# Altium PCB board_layout.pcbdoc
Units mm, origin at the board's own origin, x right, y up, seen from the top; angles counter-clockwise.
Board outline 82.6 x 98 mm, 4 copper layers (Top Layer, Mid Layer Top, Mid Layer Bottom, Bottom Layer), stack 1.742 mm thick; 10 components, 0 nets, 10 pads, 0 vias.
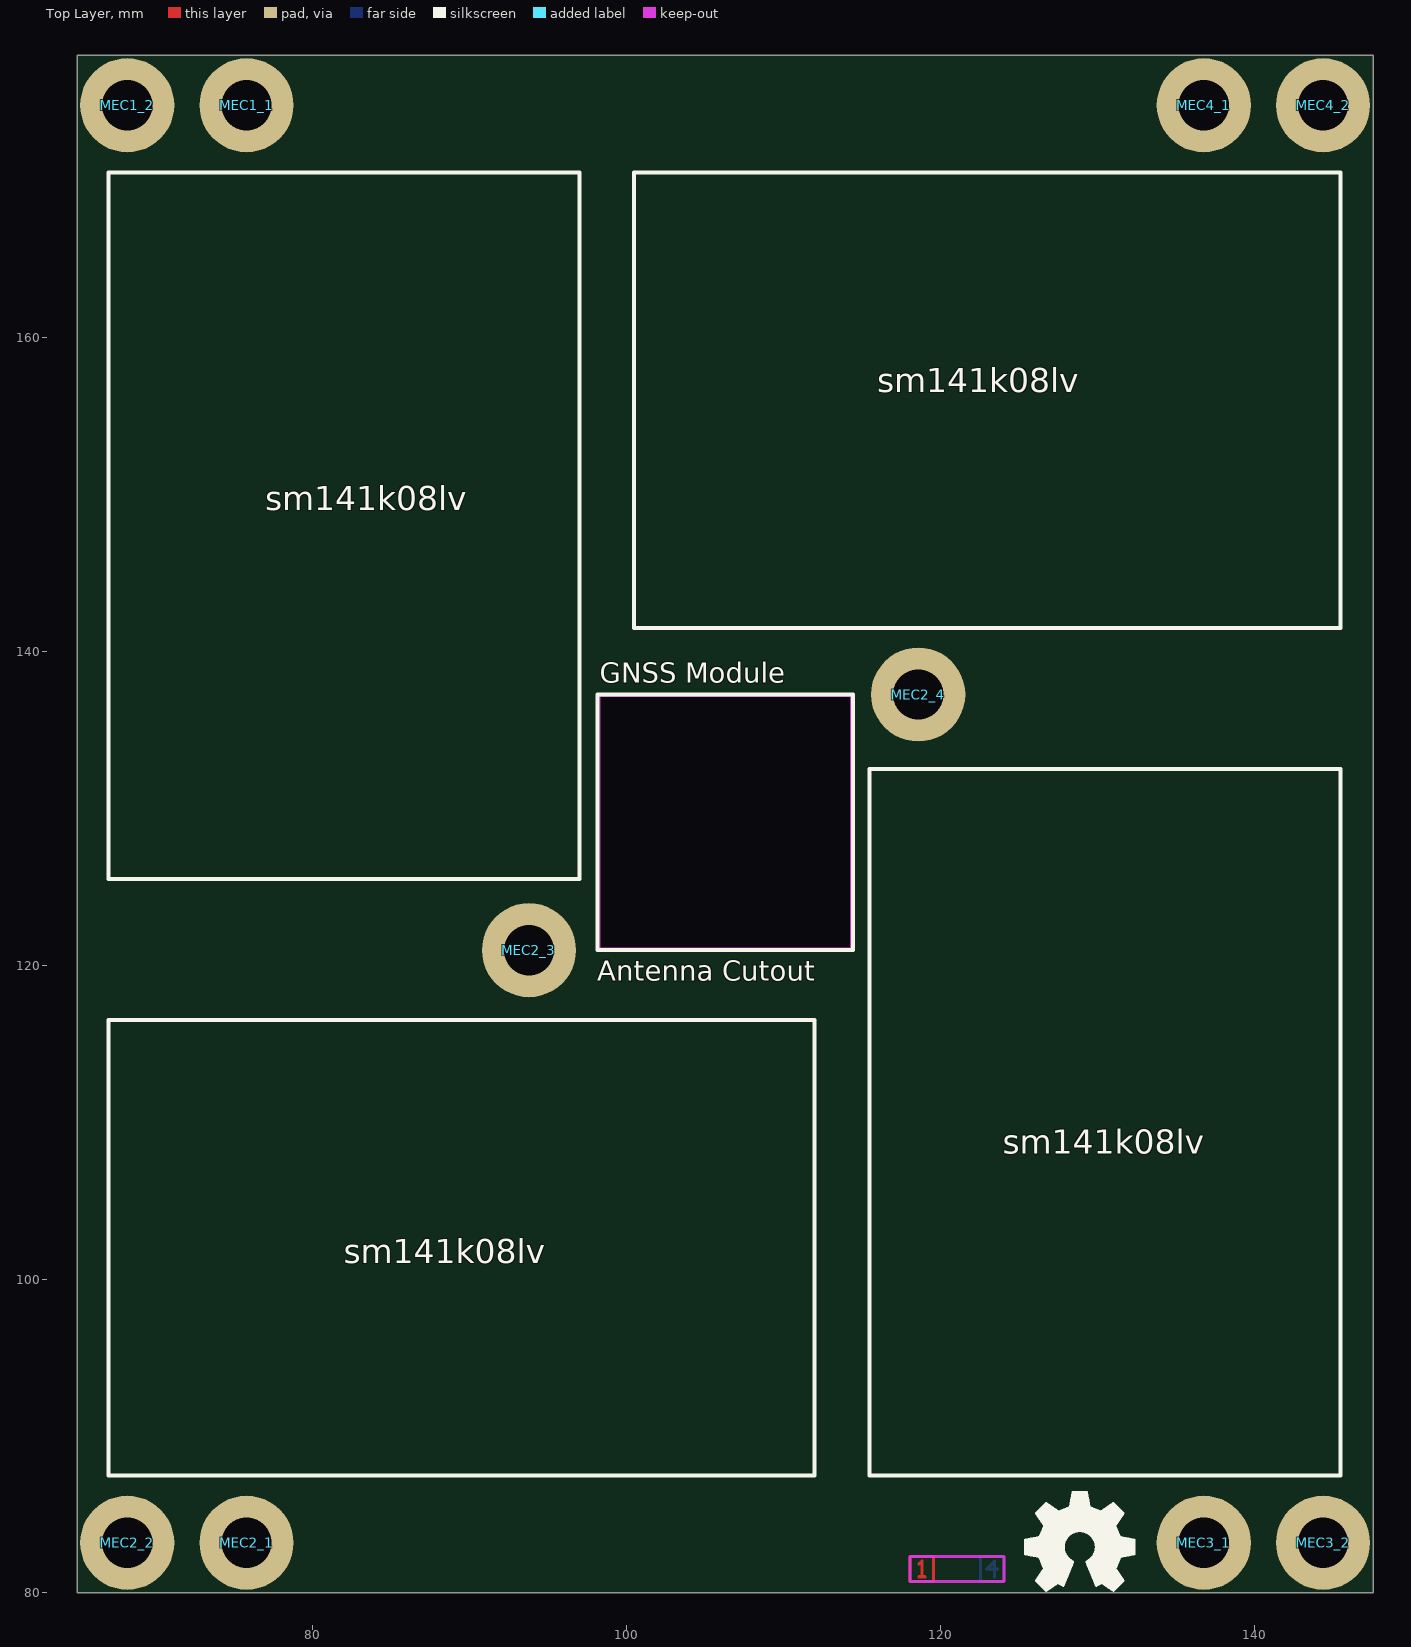
[diagram p0: Top Layer view]
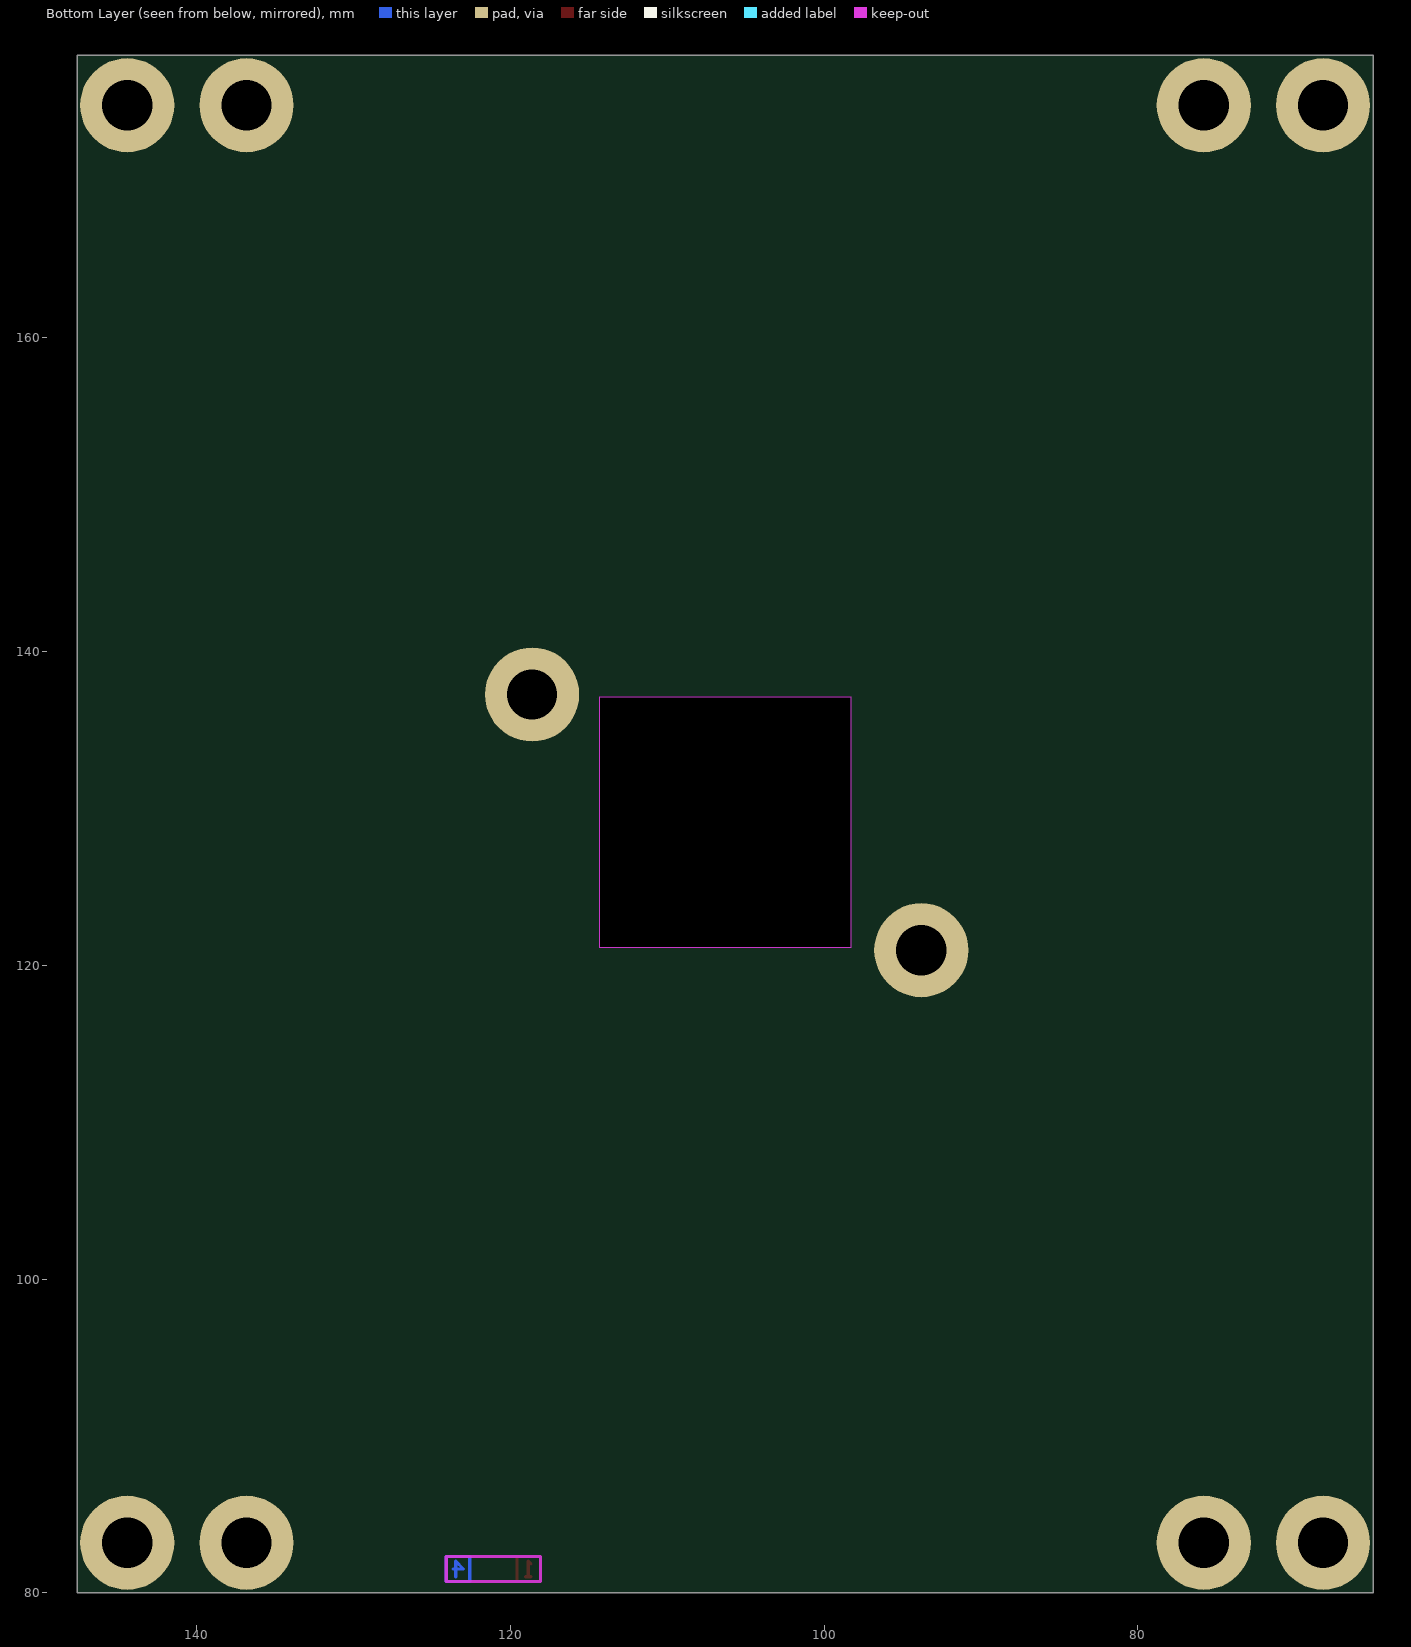
[diagram p1: Bottom Layer view, seen from below]
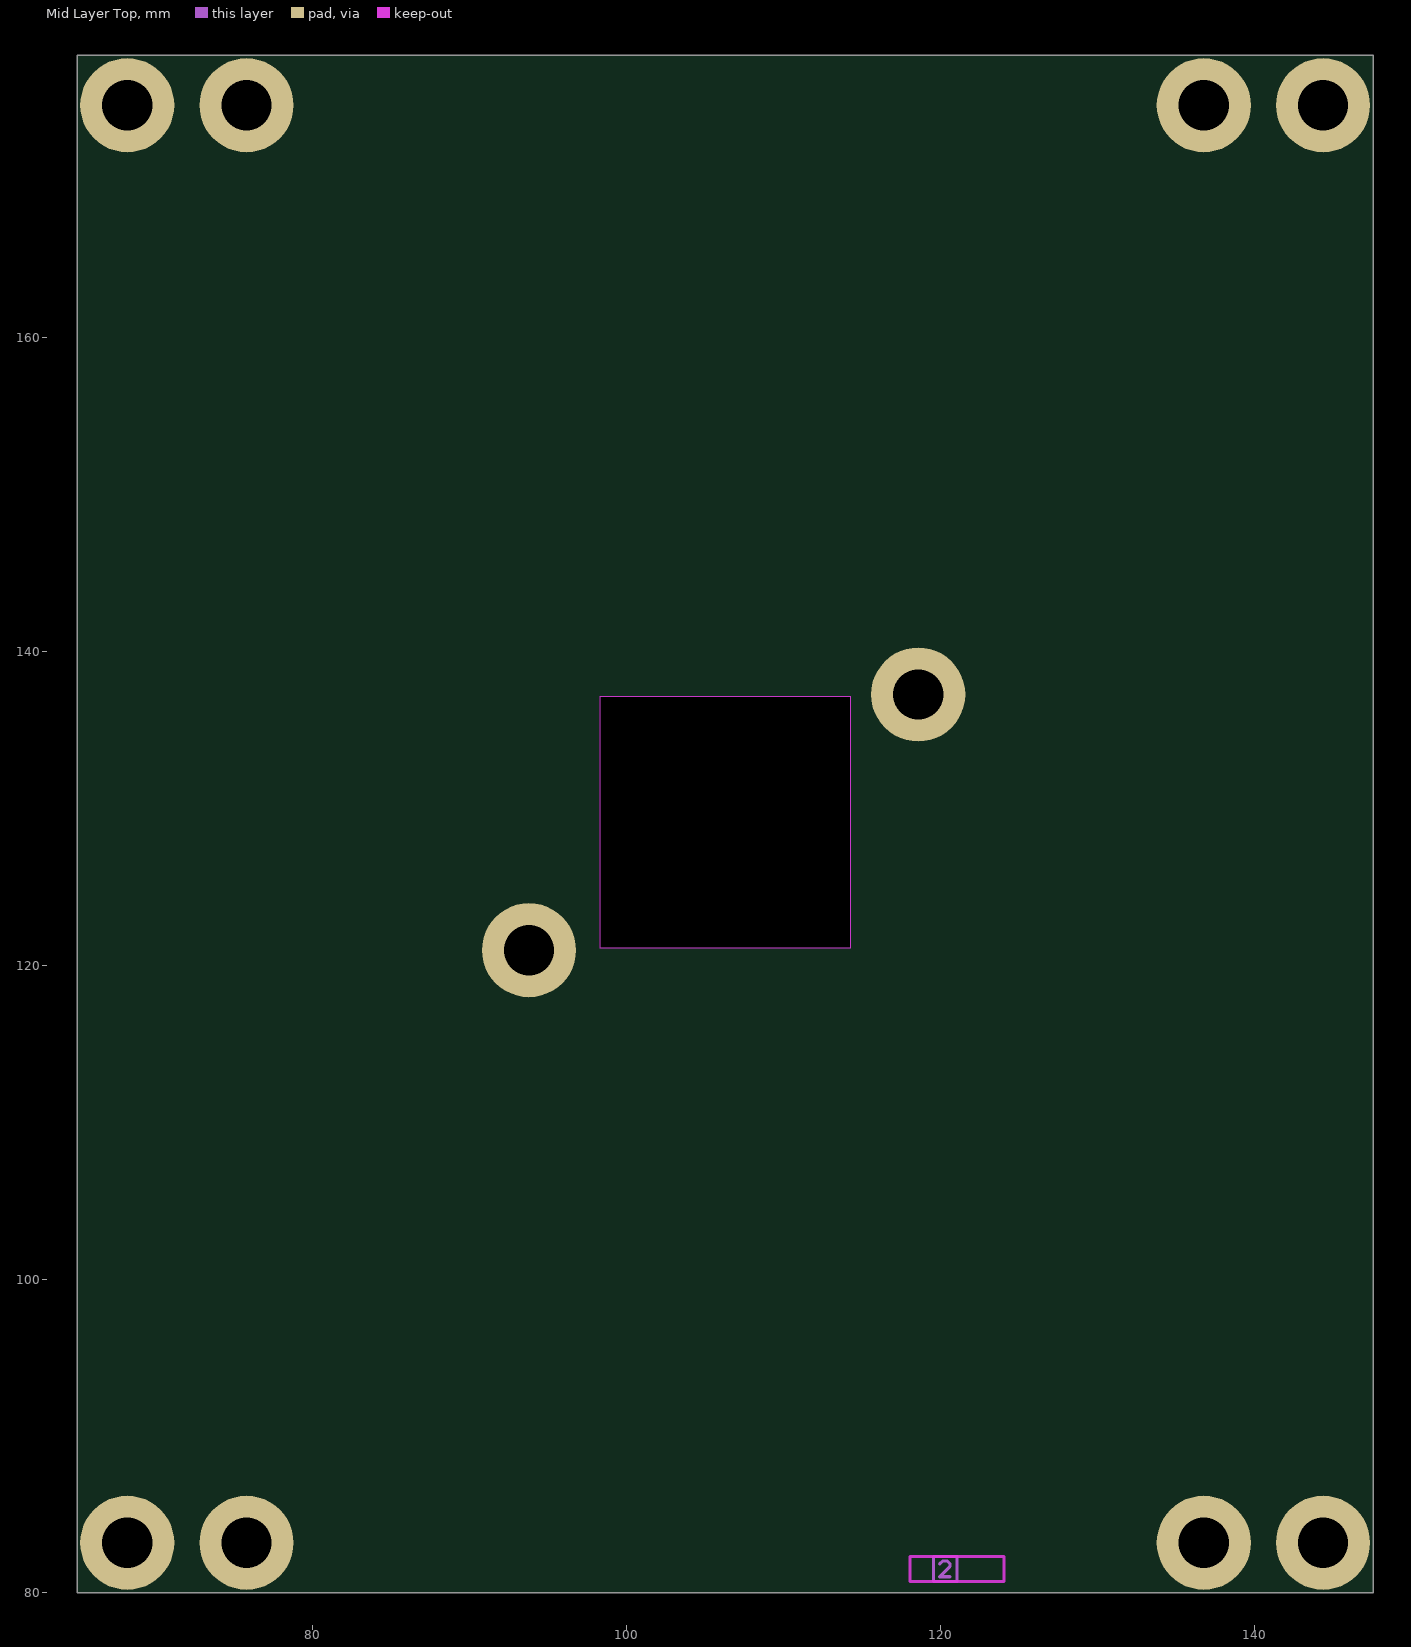
[diagram p2: Mid Layer Top]
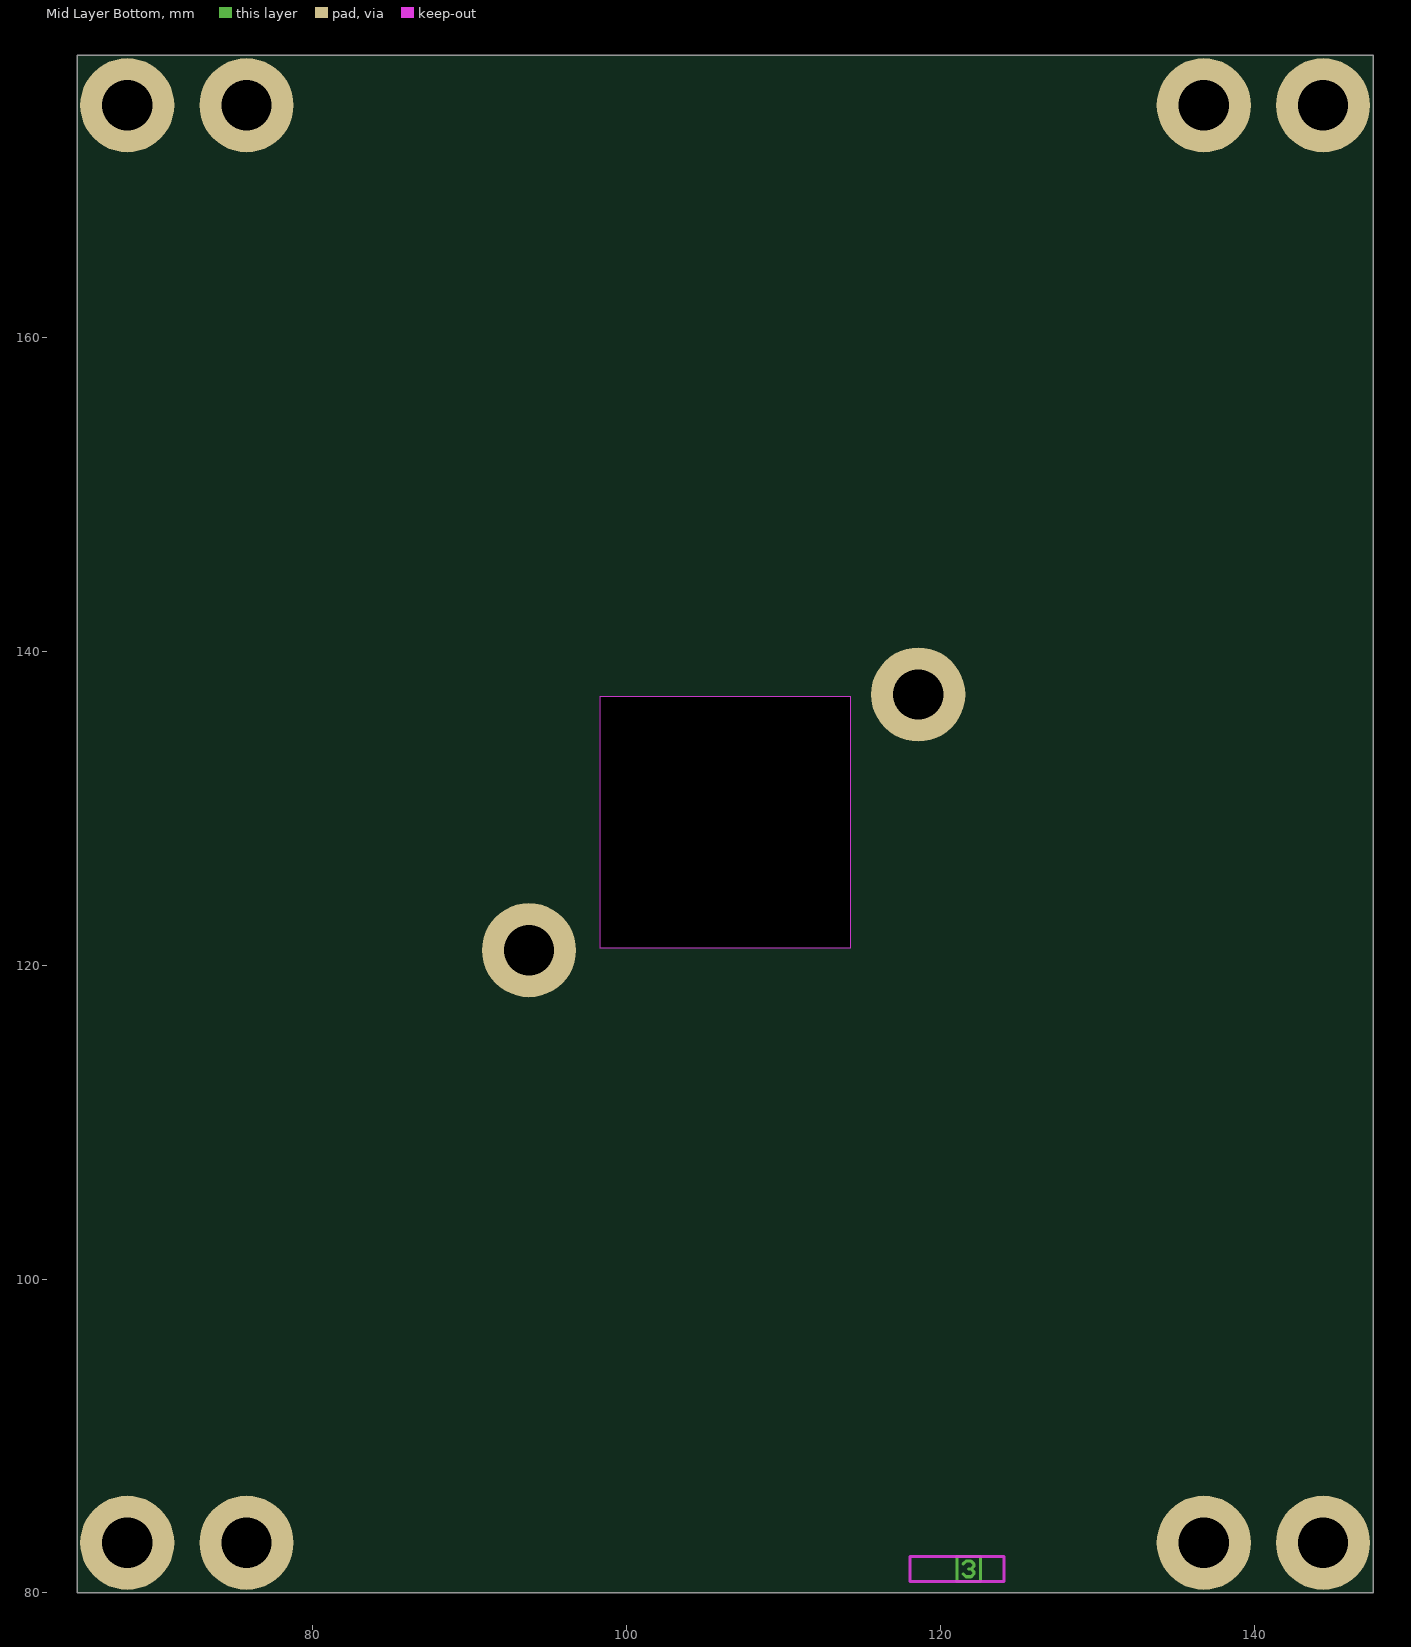
[diagram p3: Mid Layer Bottom]

## Layer stack, top to bottom
Top Solder: solder mask 0.01, Solder Resist, Dk 3.5
Top Layer: signal copper 0.035
Dielectric 1: prepreg 0.0711, PP-006, Dk 4.1
Mid Layer Top: signal copper 0.035
Dielectric Core: core 1.46, FR-4, Dk 4.8
Mid Layer Bottom: signal copper 0.035
Dielectric 2: prepreg 0.0711, PP-006, Dk 4.1
Bottom Layer: signal copper 0.035
Bottom Solder: solder mask 0.01, Solder Resist, Dk 3.5

## Board outline
65,80 147.6,80 147.6,178 65,178
cut-out: 98.3,137.1 98.3,121.1 114.3,121.1 114.3,137.1

## Design rules (kind name [scope] priority, off if disabled: settings)
Clearance Clearance_6 [InNet('GND')] p1: gap=0.254 ignorepadtopadclearanceinfootprint=FALSE except(0: Arc-Hole Track-Hole SMDPad-Hole THPad-Hole Via-Hole Fill-Hole Poly-Hole Region-Hole Text-Hole; 0.178: Arc-Arc Arc-Track Arc-SMDPad Track-Track Track-SMDPad SMDPad-SMDPad; 0.381: Arc-Text Track-Text SMDPad-Text THPad-Text Via-Text; 0.508: Fill-Text Poly-Text Region-Text Text-Text)
Clearance Clearance_1 [InNet('ESD') And OnLayer('Multi-Layer') vs OnLayer('Keep-Out Layer')] p2: gap=0.254 ignorepadtopadclearanceinfootprint=FALSE except(0: Arc-SMDPad Arc-THPad Arc-Via Arc-Hole Track-SMDPad Track-THPad Track-Via Track-Hole SMDPad-Hole THPad-Hole Via-Hole Fill-Hole Poly-Hole Region-Hole Text-Hole; 0.178: Arc-Arc Arc-Track Track-Track SMDPad-SMDPad; 0.381: Arc-Text Track-Text SMDPad-Text THPad-Text Via-Text; 0.508: Fill-Text Poly-Text Region-Text Text-Text)
Clearance Clearance_2 [OnLayer('Multi-Layer') vs OnLayer('Keep-Out Layer')] p3: gap=0.254 ignorepadtopadclearanceinfootprint=FALSE except(0: Arc-SMDPad Arc-THPad Arc-Via Arc-Hole Track-SMDPad Track-THPad Track-Via Track-Hole SMDPad-Hole THPad-Hole Via-Hole Fill-Hole Poly-Hole Region-Hole Text-Hole; 0.178: Arc-Arc Arc-Track Track-Track SMDPad-SMDPad; 0.381: Arc-Text Track-Text SMDPad-Text THPad-Text Via-Text; 0.508: Fill-Text Poly-Text Region-Text Text-Text)
Clearance [All] p4: gap=0.178 ignorepadtopadclearanceinfootprint=FALSE except(0: Arc-Hole Track-Hole SMDPad-Hole THPad-Hole Via-Hole Fill-Hole Poly-Hole Region-Hole Text-Hole; 0.177: Arc-SMDPad Arc-Via Track-SMDPad Track-Via)
DiffPairsRouting DiffPairsRouting_1 [InDifferentialPair('XT2')] p1: maxlimit=0.254 minlimit=0.254 mostfreqgap=0.254 toplayer_minwidth=0.254 toplayer_maxwidth=0.254 toplayer_prefwidth=0.254 midlayer1_minwidth=0.254 midlayer1_maxwidth=0.254 midlayer1_prefwidth=0.254 midlayer2_minwidth=0.254 midlayer2_maxwidth=0.254 midlayer2_prefwidth=0.254 bottomlayer_minwidth=0.254 bottomlayer_maxwidth=0.254 bottomlayer_prefwidth=0.254 maxuncoupledlength=12.7
DiffPairsRouting [All] p2: maxlimit=0.152 minlimit=0.152 mostfreqgap=0.152 toplayer_minwidth=0.457 toplayer_maxwidth=0.457 toplayer_prefwidth=0.457 midlayer1_minwidth=0.457 midlayer1_maxwidth=0.457 midlayer1_prefwidth=0.457 midlayer2_minwidth=0.457 midlayer2_maxwidth=0.457 midlayer2_prefwidth=0.457 bottomlayer_minwidth=0.457 bottomlayer_maxwidth=0.457 bottomlayer_prefwidth=0.457 maxuncoupledlength=12.7
HoleSize [All] p1: absolutevalues=TRUE maxlimit=5.08 minlimit=0.025 maxpercent=80.000 minpercent=20.000
MinimumSolderMaskSliver [All] p1: minsoldermaskwidth=0
PlaneConnect [InNetClass('power')] p1: planeconnectstyle=Direct reliefexpansion=0.508 reliefentries=4 reliefconductorwidth=0.254 reliefairgap=0.254
PlaneConnect PlaneConnect_1 [All] p2: planeconnectstyle=Relief reliefexpansion=0.508 reliefentries=4 reliefconductorwidth=0.254 reliefairgap=0.254
PolygonConnect PolygonConnect_3 [InNet('GND') vs InNet('GND')] p1: thpad.connectstyle=Direct thpad.reliefconductorwidth=0.508 thpad.reliefentries=4 thpad.polygonreliefangle="90 Angle" thpad.airgapwidth=0.254 smdpad.connectstyle=Relief smdpad.reliefconductorwidth=0.508 smdpad.reliefentries=4 smdpad.polygonreliefangle="90 Angle" smdpad.airgapwidth=0.254 via.connectstyle=Direct via.reliefconductorwidth=0.508 via.reliefentries=4 via.polygonreliefangle="90 Angle" via.airgapwidth=0.254
PolygonConnect PolygonConnect_2 [InNet('AGND') vs InNet('AGND')] p2: thpad.connectstyle=Direct thpad.reliefconductorwidth=0.254 thpad.reliefentries=4 thpad.polygonreliefangle="90 Angle" thpad.airgapwidth=0.254 smdpad.connectstyle=Relief smdpad.reliefconductorwidth=0.508 smdpad.reliefentries=4 smdpad.polygonreliefangle="90 Angle" smdpad.airgapwidth=0.254 via.connectstyle=Direct via.reliefconductorwidth=0.254 via.reliefentries=4 via.polygonreliefangle="90 Angle" via.airgapwidth=0.254
PolygonConnect [InNetClass('power')] p3: connectstyle=Direct reliefconductorwidth=0.254 reliefentries=4 polygonreliefangle="90 Angle" airgapwidth=0.254
PolygonConnect PolygonConnect_1 [All] p4: connectstyle=Direct reliefconductorwidth=0.254 reliefentries=4 polygonreliefangle="90 Angle" airgapwidth=0.254
RoutingVias [All] p1: holewidth=0.3 width=0.6 viastyle="Through Hole" minholewidth=0.3 minwidth=0.6 maxholewidth=0.9 maxwidth=1.5
SilkToSilkClearance [All] p1: silktosilkclearance=0.127
SilkToSolderMaskClearance [IsPad] p1: minsilkscreentomaskgap=0 clearancetoexposedcopper=TRUE
SolderMaskExpansion [All] p1: expansion=0.178
Width Width_Power [InNetClass('Power')] p1: maxlimit=0.762 minlimit=0.508 preferedwidth=0.508
Width [All] p2: maxlimit=1.778 minlimit=0.127 preferedwidth=0.254
24 further rules are at their usual default settings.

## Classes and differential pairs
component class 0_architecture: M1 M2 M3 M4 M5 M6 M7 M8

## Components (designator, comment, footprint, x,y, rotation, side; value= is the part's Value field where it differs from the comment)
MEC1_1 "M3" "M3 hole"#1 68.2,174.8 r0 top (schematic designator MEC1)
MEC1_2 "M3" "M3 hole"#2 68.2,174.8 r0 top (schematic designator MEC1)
MEC2_1 "M3" "M3 hole"#1 68.2,83.2 r0 top (schematic designator MEC2)
MEC2_2 "M3" "M3 hole"#2 68.2,83.2 r0 top (schematic designator MEC2)
MEC2_3 "M3" "M3 hole"#1 86.2,120.957 r0 top (schematic designator MEC2)
MEC2_4 "M3" "M3 hole"#3 112.1,137.25 r0 top (schematic designator MEC2)
MEC3_1 "M3" "M3 hole"#4 144.4,83.2 r0 top (schematic designator MEC3)
MEC3_2 "M3" "M3 hole"#2 144.4,83.2 r0 top (schematic designator MEC3)
MEC4_1 "M3" "M3 hole"#4 144.4,174.8 r0 top (schematic designator MEC4)
MEC4_2 "M3" "M3 hole"#2 144.4,174.8 r0 top (schematic designator MEC4)

## Footprints (in the part's own frame and the unit in brackets; to place one, negate y for a bottom-side part, rotate by r counter-clockwise, add the part's x,y. Pads: shape width x height; smd on the part's side, far side on the other; paste and mask are expansions set on the pad)
"M3 hole"#1 [mm]
  round 6 hole 3.2: 0(7.6,0)
"M3 hole"#2 [mm]
  round 6 hole 3.2: 0(0,0)
"M3 hole"#3 [mm]
  round 6 hole 3.2: 0(6.5,0)
"M3 hole"#4 [mm]
  round 6 hole 3.2: 0(-7.6,0)

## Part data
MEC1_1 MEC1_2 MEC2_1 MEC2_2 MEC2_3 MEC2_4 MEC3_1 MEC3_2 MEC4_1 MEC4_2: library part "M3 hole", "M3 hole"

## Nets (pads, with @x,y where several pads share a name; then routed paths per layer and width w, separated by ;. In a path a pad name is that pad's centre, name@x,y a point inside that pad or via, vN(x,y) a via of type N, cw(c..) or ccw(c..) an arc to the next point about the centre after c; other vN are vias at no path point)
pads on no net: MEC1_1.0 MEC1_2.0 MEC2_1.0 MEC2_2.0 MEC2_3.0 MEC2_4.0 MEC3_1.0 MEC3_2.0 MEC4_1.0 MEC4_2.0
copper on no net: | length 33.9
  Top Layer w0.2: 118.672,81.031 118.847,81.031 ; 118.672,81.856 118.847,82.031 118.847,81.031 ; 119.022,81.031 118.847,81.031 ; 118.072,80.731 119.572,80.731 119.572,82.331 118.072,82.331 118.072,80.731
  Mid Layer Top w0.2: 119.972,81.856 120.147,82.031 120.472,82.031 120.622,81.881 120.622,81.681 119.972,81.031 120.622,81.031 ; 119.572,80.731 121.072,80.731 121.072,82.331 119.572,82.331 119.572,80.731
  Mid Layer Bottom w0.2: 121.472,81.206 121.647,81.031 121.972,81.031 122.147,81.206 122.147,81.356 121.972,81.531 ; 121.472,81.856 121.647,82.031 121.972,82.031 122.147,81.856 122.147,81.706 121.972,81.531 ; 121.797,81.531 121.972,81.531 ; 121.072,80.731 122.572,80.731 122.572,82.331 121.072,82.331 121.072,80.731
  Bottom Layer w0.2: 123.472,81.031 123.472,82.031 122.972,81.531 123.647,81.531 ; 122.572,80.731 122.572,82.331 124.072,82.331 124.072,80.731 122.572,80.731

## Keep-outs
Keep-Out Layer:
  lines w0.2: 118.072,80.731 124.072,80.731 124.072,82.331 118.072,82.331 118.072,80.731

## Other copper
Top Layer:
  text "'.Layer_Name'" at 231.245,45.003 h2.5
Bottom Layer:
  text "'.Layer_Name'" at 231.245,45.003 h2.5

## Silkscreen, mask and mechanical layers (free items; w line width, h text height)
Top Overlay:
  drawing of 997 lines, arcs and shapes, not listed
  text "sm141k08lv" at 116,156.5 h1.52
  text "sm141k08lv" at 77,149 h1.52
  text "GNSS Module" at 98.3,138 h1.27
  text "Antenna Cutout" at 98.15,119 h1.27
  text "sm141k08lv" at 124,108 h1.52
  text "sm141k08lv" at 82,101 h1.52
  text "'.Layer_Name'" at 231.245,45.003 h2.5
Bottom Overlay:
  text "'.Layer_Name'" at 231.245,45.003 h2.5
Top Paste:
  text "'.Layer_Name'" at 231.245,45.003 h2.5
Bottom Paste:
  text "'.Layer_Name'" at 231.245,45.003 h2.5
Top Solder:
  rectangle: 117.872,80.531 124.272,82.531
  lines w0.2: 117.872,80.731 ccw(c118.072,80.731) 118.072,80.531 124.072,80.531 ccw(c124.072,80.731) 124.272,80.731 124.272,82.331 ccw(c124.072,82.331) 124.072,82.531 118.072,82.531 ccw(c118.072,82.331) 117.872,82.331 117.872,80.731
  text "'.Layer_Name'" at 231.245,45.003 h2.5
Bottom Solder:
  rectangle: 117.872,80.531 124.272,82.531
  lines w0.2: 117.872,80.731 ccw(c118.072,80.731) 118.072,80.531 124.072,80.531 ccw(c124.072,80.731) 124.272,80.731 124.272,82.331 ccw(c124.072,82.331) 124.072,82.531 118.072,82.531 ccw(c118.072,82.331) 117.872,82.331 117.872,80.731
  text "'.Layer_Name'" at 231.245,45.003 h2.5
Drill Guide:
  text "'.Layer_Name'" at 231.245,45.003 h2.5
3D Body:
  text "'.Layer_Name'" at 231.275,44.958 h2.5
Dimension:
  text "'.Layer_Name'" at 231.245,45.003 h2.5
Mechanical 3:
  text "'.Layer_Name'" at 238.57,51.195 h2.5
Mechanical 4:
  text "'.Layer_Name'" at 238.57,51.195 h2.5
Mechanical 8:
  text "'.Layer_Name'" at 238.57,51.195 h2.5
Board Edge:
  the board outline again, w0.254
ASM Bottom:
  text "'.Layer_Name'" at 231.275,45.008 h2.5
ASM Top:
  text "'.Layer_Name'" at 231.245,45.003 h2.5
Sheet:
  drawing of 339 lines, arcs and shapes, not listed
  text "1" at 62.42,218.152 h1.78
  text "2" at 135.064,218.152 h1.78
  text "3" at 208.216,218.152 h1.78
  text "4" at 281.114,218.152 h1.78
  text "Layer" at 185.885,196.342 h1.52
  text "Name" at 196.297,196.342 h1.52
  text "Material" at 222.96,196.342 h1.52
  text "Thickness" at 244.798,196.342 h1.52
  text "Constant" at 261.304,196.342 h1.52
  text "Board Layer Stack" at 275.778,196.342 h1.52
  text "A" at 28.079,195.14 h1.78
  text "A" at 315.099,195.14 h1.78
  text "Top Overlay" at 196.297,193.294 h1.52
  text "Top Solder" at 196.297,190.246 h1.52
  text "Solder Resist" at 222.96,190.246 h1.52
  text "0,39mil" at 244.798,190.246 h1.52
  text "3,5" at 261.304,190.246 h1.52
  text "1" at 185.885,187.198 h1.52
  text "Top Layer" at 196.297,187.198 h1.52
  text "Copper" at 222.96,187.198 h1.52
  text "1,38mil" at 244.798,187.198 h1.52
  text "Dielectric 1" at 196.297,184.15 h1.52
  text "PP-006" at 222.96,184.15 h1.52
  text "2,80mil" at 244.798,184.15 h1.52
  text "4,1" at 261.304,184.15 h1.52
  text "2" at 185.885,181.102 h1.52
  text "Mid Layer Top" at 196.297,181.102 h1.52
  text "Copper" at 222.96,181.102 h1.52
  text "1,38mil" at 244.798,181.102 h1.52
  text "Dielectric Core" at 196.297,178.054 h1.52
  text "FR-4" at 222.96,178.054 h1.52
  text "57,48mil" at 244.798,178.054 h1.52
  text "4,8" at 261.304,178.054 h1.52
  text "3" at 185.885,175.006 h1.52
  text "Mid Layer Bottom" at 196.297,175.006 h1.52
  text "Copper" at 222.96,175.006 h1.52
  text "1,38mil" at 244.798,175.006 h1.52
  text "Dielectric 2" at 196.297,171.958 h1.52
  text "PP-006" at 222.96,171.958 h1.52
  text "2,80mil" at 244.798,171.958 h1.52
  text "4,1" at 261.304,171.958 h1.52
  text "4" at 185.885,168.91 h1.52
  text "Bottom Layer" at 196.297,168.91 h1.52
  text "Copper" at 222.96,168.91 h1.52
  text "1,38mil" at 244.798,168.91 h1.52
  text "Bottom Solder" at 196.297,165.862 h1.52
  text "Solder Resist" at 222.96,165.862 h1.52
  text "0,39mil" at 244.798,165.862 h1.52
  text "3,5" at 261.304,165.862 h1.52
  text "Bottom Overlay" at 196.297,162.814 h1.52
  text "B" at 28.079,147.083 h1.78
  text "B" at 315.099,147.083 h1.78
  text "Fabrication specifications:" at 184.012,125.356 h3.1
  text "- Copper base 1OZ:  / - PCB Material: Prepeg FR4-Standard / - PCB Tickness: 1.6mm / - PCB Surface: HASL (with lead)" at 184.006,108.372 h1.73
  text "- Silkscreen Color: White (top and bottom) / - Soldermask Color: Blue / - Vias: Force Complete Tenting / - Special: Stack-up (herein included)" at 241.706,108.372 h1.73
  text "Assembly specifications:" at 184.287,102.376 h3.1
  text "C" at 28.079,98.569 h1.78
  text "C" at 315.099,98.569 h1.78
  text "- Solder composition: Include lead / - Fiducials: 3 top and 3 bottom avaliable / - Check BOM for not placed components" at 184.281,85.382 h1.73
  text "Notes:" at 184.281,83.012 h3.1
  text "- 5220mm^2 of solar cells area / - Center screws for devices attachment / - GNSS antenna cutout" at 184.281,66 h1.73
  text "SpaceLab - Federal University of Santa Catarina" at 224.174,54.541 h2.5
  text "D" at 28.079,50.563 h1.78
  text "D" at 315.099,50.563 h1.78
  text "Project:" at 224.174,50.041 h2.5
  text "SPY" at 232.174,50.041 h2.5
  text "Layer:" at 224.174,45.041 h2.5
  text "Designed by:" at 224.174,40.041 h2.5
  text "Project Code:" at 282.174,40.041 h2.5
  text "SPY" at 296.674,40.041 h2.5
  text "Andre M. P. Mattos" at 238.1,40.008 h2.5
  text "v0.1" at 262.2,35.108 h2.5
  text "Date:" at 224.174,35.041 h2.5
  text "'.Print_Date'" at 230.174,35.041 h2.5
  text "Version:" at 253.174,35.041 h2.5
  text "Size:" at 282.174,35.041 h2.5
  text "A4" at 288.174,35.041 h2.5
  text "1" at 62.42,30.192 h1.78
  text "2" at 135.064,30.192 h1.78
  text "3" at 208.216,30.192 h1.78
  text "4" at 281.114,30.192 h1.78
Drill Drawing:
  circle w0.254: c186.069,138.065 r0.675
  lines w0.381: 184.167,136.478 299.09,136.478 ; 184.167,139.518 299.09,139.518 ; 195.492,133.439 195.492,142.557 ; 206.331,133.439 206.331,142.557 ; 230.132,133.439 230.132,142.557 ; 240.546,133.439 240.546,142.557 ; 255.578,133.439 255.578,142.557 ; 286.063,133.439 286.063,142.557 ; 184.167,133.439 299.09,133.439 299.09,142.557 184.167,142.557 184.167,133.439
  text "Symbol" at 185.99,140.429 h1.46
  text "Count" at 196.404,140.429 h1.46
  text "Hole Size" at 207.242,140.429 h1.46
  text "Plated" at 231.044,140.429 h1.46
  text "Hole Type" at 241.458,140.429 h1.46
  text "Drill Layer Pair" at 256.49,140.429 h1.46
  text "Via/Pad" at 286.975,140.429 h1.46
  text "10" at 196.404,137.39 h1.22
  text "3,200mm (125,98mil)" at 207.242,137.39 h1.22
  text "PTH" at 231.044,137.39 h1.22
  text "Round" at 241.458,137.39 h1.22
  text "Top Layer - Bottom Layer" at 256.49,137.39 h1.22
  text "Pad" at 286.975,137.39 h1.22
  text "10 Total" at 196.404,134.351 h1.22
  text "'.Layer_Name'" at 231.245,45.003 h2.5
  text "'.Layer_Name'" at 231.245,45.003 h2.5

## Dimensions
65,178 to 147.6,178 on Dimension
147.6,178 to 147.6,80 on Dimension
68.2,174.8 to 144.4,174.8 on Dimension
144.4,178.232 to 147.6,178.21 on Dimension
144.4,174.8 to 144.4,83.2 on Dimension
147.832,83.2 to 147.854,80 on Dimension